# Altium PCB PCB1.PcbDoc
Units mil, origin at the board's own origin, x right, y up, seen from the top; angles counter-clockwise.
Board outline 6000 x 4000 mil, 2 copper layers (Top Layer, Bottom Layer); 24 components, 23 nets, 82 pads, 0 vias.
Unrouted connection lines stored in the file: 52.
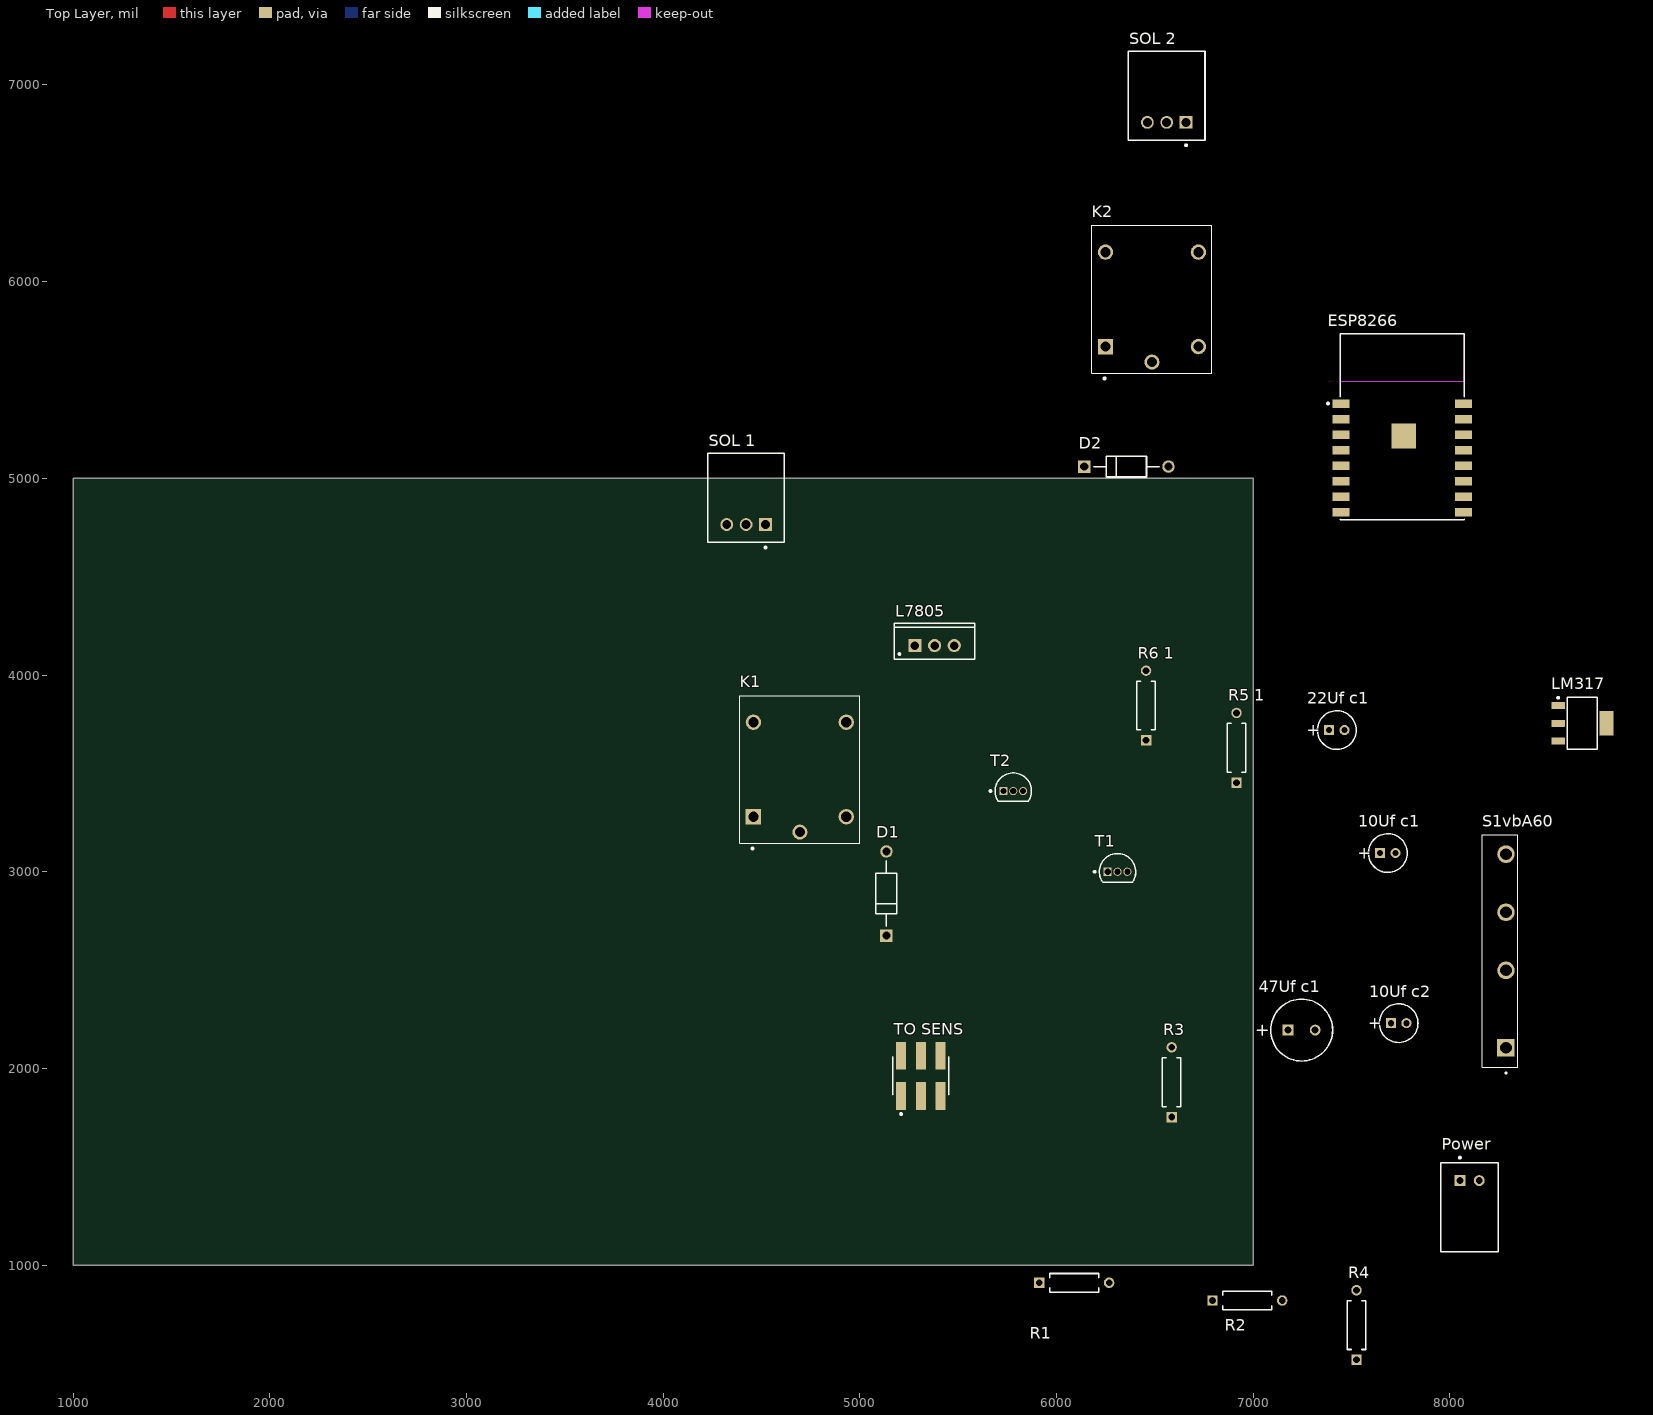
[diagram p0: Top Layer view]
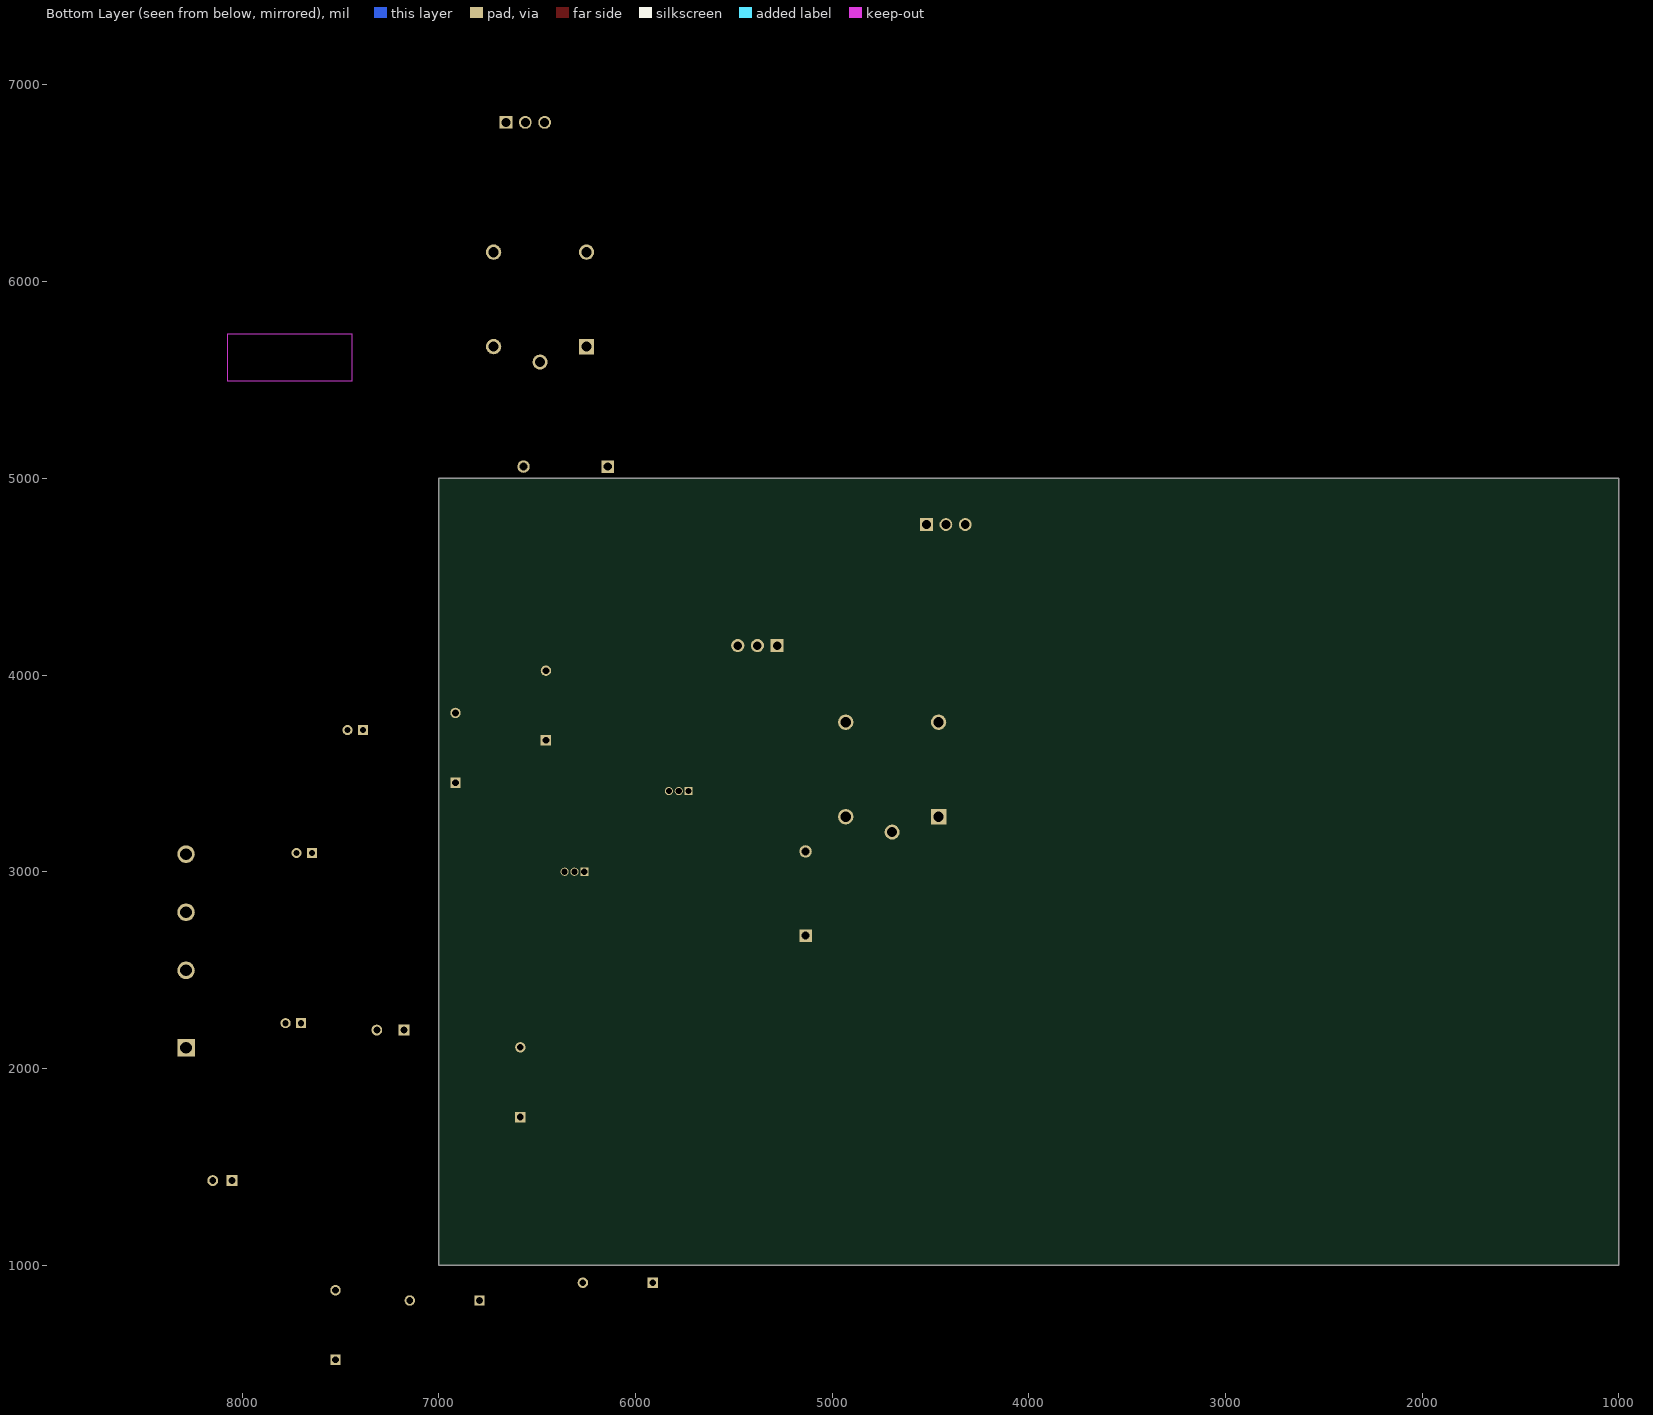
[diagram p1: Bottom Layer view, seen from below]

## Layer stack, top to bottom
Top Solder: solder mask 0.4, Solder Resist, Dk 3.5
Top Layer: signal copper 1.4
Dielectric 1: dielectric 12.6, FR-4, Dk 4.8
Bottom Layer: signal copper 1.4
Bottom Solder: solder mask 0.4, Solder Resist, Dk 3.5

## Board outline
1000,1000 7000,1000 7000,5000 1000,5000

## Design rules (kind name [scope] priority, off if disabled: settings)
BoardOutlineClearance [All] p1: gap=7.87 ignorepadtopadclearanceinfootprint=FALSE
Clearance [All] p1: gap=5 ignorepadtopadclearanceinfootprint=FALSE except(9.84: Arc-Hole Track-Hole SMDPad-Hole THPad-Hole Via-Hole Fill-Hole Poly-Hole Region-Hole Text-Hole)
ComponentClearance [All] p1: gap=5 collisioncheckmode=3 verticalgap=5 showdistances=TRUE
DiffPairsRouting [All] p1: maxlimit=10 minlimit=5 mostfreqgap=5 toplayer_minwidth=5 toplayer_maxwidth=1000 toplayer_prefwidth=5 bottomlayer_minwidth=5 bottomlayer_maxwidth=1000 bottomlayer_prefwidth=5 maxuncoupledlength=500
Height [All] p1: minheight=0 maxheight=71497.94 prefheight=500
HoleSize [All] p1: absolutevalues=TRUE maxlimit=248.03 minlimit=11.81 maxpercent=80.000 minpercent=20.000
HoleToHoleClearance [All] p1: gap=9.84 allowstackedmicrovias=FALSE
MinimumAnnularRing [All] p1: minimumring=3
MinimumSolderMaskSliver [All] p1: minsoldermaskwidth=0
PlaneClearance [All] p1: clearance=5
PlaneConnect PlaneConnectPowerPads [InPadClass('PowerPads')] p1: planeconnectstyle=Direct reliefexpansion=20 reliefentries=4 reliefconductorwidth=10 reliefairgap=10
PlaneConnect [All] p2: pad.planeconnectstyle=Relief pad.reliefexpansion=11.81 pad.reliefentries=4 pad.reliefconductorwidth=5 pad.reliefairgap=5 via.planeconnectstyle=Direct via.reliefexpansion=11.81 via.reliefentries=4 via.reliefconductorwidth=5 via.reliefairgap=5
PolygonConnect PolygonConnectPowerPads [All vs (InPadClass('PowerPads'))] p1: connectstyle=Direct reliefconductorwidth=10 reliefentries=4 polygonreliefangle="90 Angle" airgapwidth=10
PolygonConnect [All] p2: thpad.connectstyle=Relief thpad.reliefconductorwidth=5 thpad.reliefentries=4 thpad.polygonreliefangle="90 Angle" thpad.airgapwidth=5 smdpad.connectstyle=Relief smdpad.reliefconductorwidth=5 smdpad.reliefentries=4 smdpad.polygonreliefangle="90 Angle" smdpad.airgapwidth=5 via.connectstyle=Direct via.reliefconductorwidth=5 via.reliefentries=4 via.polygonreliefangle="90 Angle" via.airgapwidth=5
RoutingVias [All] p1: holewidth=11.81 width=23.62 viastyle="Through Hole" minholewidth=11.81 minwidth=23.62 maxholewidth=23.62 maxwidth=259.84
SilkToSilkClearance [All] p1: silktosilkclearance=0
SilkToSolderMaskClearance [IsPad] p1: minsilkscreentomaskgap=5 clearancetoexposedcopper=TRUE
SolderMaskExpansion [All] p1: expansion=2.95 istentingtop=FALSE
Width [All] p1: maxlimit=1000 minlimit=5 preferedwidth=5 minimp=50.000000 maximp=50.000000 favimp=50.000000
20 further rules are at their usual default settings.

## Components (designator, comment, footprint, x,y, rotation, side; value= is the part's Value field where it differs from the comment)
"10Uf c1" "ECA1HM100" CAPPR55-200-1100X500X1200 7684.37,3095 r0 top value=10µF
"10Uf c2" "ECA1HM100" CAPPR55-200-1100X500X1200 7739.37,2230 r0 top value=10µF
"22Uf c1" "ECA1HM220" CAPPR55-200-1100X500X1200 7425,3720 r0 top value=22µF
"47Uf c1" "ECA-2AM470" CAPPR65-350-1150X800X1250 7246.1,2195 r0 top value=47µF
D1 "1N4007-E3/54" FP-1N4007-MFG 5135,2889.09 r90 top value=15pF
D2 "1N4007-E3/54" FP-1N4007-MFG 6355,5060 r0 top value=15pF
ESP8266 "ESP-12S" FP-ESP-12S-MFG 7757.13,5262.24 r0 top
K1 "SRD-05VDC-SL-C" RELAY_SRD-05VDC-SL-C 4695,3520 r90 top
K2 "SRD-05VDC-SL-C" RELAY_SRD-05VDC-SL-C 6485,5910 r90 top
L7805 "L7805CV" TO220 5380,4150 r0 top
LM317 "LM317EMP" DCY0004A_N 8673.03,3754.45 r0 top
Power "S2B-XH-A(LF)(SN)" JST-S2B-XH-A(LF)(SN)_V 8100,1430 r0 top
R1 "MFR-25FBF52-10K" RESA60-630X240 6090,910 r0 top value=10k
R2 "MFR-25FBF52-10K" RESA60-630X240 6970,820 r0 top value=10k
R3 "MFR-25FBF52-10K" RESA60-630X240 6585,1930 r90 top value=10k
R4 "MFR-25FBF52-10K" RESA60-630X240 7525,695 r90 top value=10k
"R5 1" "MFR-25FBF52-1K" RESA60-630X240 6915,3630 r90 top value=1k
"R6 1" "MFR-25FBF52-1K" RESA60-630X240 6455,3845 r90 top value=1k
S1vbA60 "S1VBA60-7000" DIOB_LL15XB60-7000 8285,2597.13 r90 top
"SOL 1" "S3B-XH-A(LF)(SN)" JST-S3B-XH-A(LF)(SN)_V 4421.57,4765 r180 top
"SOL 2" "S3B-XH-A(LF)(SN)" JST-S3B-XH-A(LF)(SN)_V 6560,6810 r180 top
T1 "BC547CG" ONSC-TO-92-3-29-11 6310,3000 r0 top
T2 "BC547CG" ONSC-TO-92-3-29-11 5780,3410 r0 top
"TO SENS" "5-146130-2" TECO-5-146130-2_V 5310,1962.44 r0 top

## Footprints (in the part's own frame and the unit in brackets; to place one, negate y for a bottom-side part, rotate by r counter-clockwise, add the part's x,y. Pads: shape width x height; smd on the part's side, far side on the other; paste and mask are expansions set on the pad)
CAPPR55-200-1100X500X1200 [mm] "THD, 2-Leads, Dia 5mm, Pin Spacing 2mm"
  rect 1.3x1.3 hole 0.8: 1(-1,0)
  round 1.3 hole 0.8: 2(1,0)
  silkscreen extent -2.5,-2.5 2.5,2.5, body extent -2.5,-2.5 2.45,2.5, height 12
CAPPR65-350-1150X800X1250 [mm] "THD, 2-Leads, Dia 8mm, Pin Spacing 3.5mm"
  rect 1.4x1.4 hole 0.9: 1(-1.75,0)
  round 1.4 hole 0.9: 2(1.75,0)
  silkscreen extent -5.71,-4 4,4, body extent -4,-4 3.95,4, height 12.5
DCY0004A_N [mm] "SOT223, 4-Leads, Body 6.7x3.7mm, Pitch 2.3mm, IPC Medium Density"
  rrect11% 1.75x0.9 smd: 1(-3.125,2.3) 2(-3.125,0) 3(-3.125,-2.3)
  rrect6% 1.75x3.2 smd: 4(3.125,0)
  silkscreen extent -3.25,-3.35 1.95,3.42, body extent -3.5,-3.25 3.5,3.25, height 1.62
DIOB_LL15XB60-7000 [mm]
  rect 2.265x2.265 / inner round 2.265 / far side rect 2.265x2.265 hole 1.51: 1(-12.5,0)
  round 2.265 hole 1.51: 2(-2.5,0) 3(5,0) 4(12.5,0)
  silkscreen extent -15.85,-1.55 15,3.05, body extent -15,-1.55 15,3.05, height 24.5
FP-1N4007-MFG [mm]
  rect 1.6x1.6 hole 1.05 paste-1000 mask+0: 1(-5.438,0)
  round 1.6 hole 1.05 paste-1000 mask+0: 2(5.438,0)
  silkscreen extent -4.24,-1.35 4.24,1.35, body extent -6.34,-1.45 6.34,1.45, height 0.25
FP-ESP-12S-MFG [mm]
  rect 2.2x1.1 smd paste+0 mask+0: 1(-7.9,2.95) 2(-7.9,0.95) 3(-7.9,-1.05) 4(-7.9,-3.05) 5(-7.9,-5.05) 6(-7.9,-7.05) 7(-7.9,-9.05) 8(-7.9,-11.05) 9(7.9,-11.05) 10(7.9,-9.05) 11(7.9,-7.05) 12(7.9,-5.05) 13(7.9,-3.05) 14(7.9,-1.05) 15(7.9,0.95) 16(7.9,2.95)
  rect 3.2x3.2 smd paste+0 mask+0: 17(0.2,-1.2)
  Keep-Out Layer region: -8,5.9 8,5.9 8,12 -8,12
  Keep-Out Layer region: -8,5.9 8,5.9 8,12 -8,12
  silkscreen extent -9.7,-12 8,12, body extent -9.1,-12.1 9.1,12.1, height 0.25
JST-S2B-XH-A(LF)(SN)_V [mm] "Header, 2-Leads, Body 7.4x11.5mm, Pitch 2.5mm"
  rect 1.4x1.4 hole 0.9: 1(-1.25,0)
  round 1.4 hole 0.9: 2(1.25,0)
  silkscreen extent -3.7,-9.2 3.7,3.08, body extent -3.7,-9.2 3.7,2.3, height 5.95
JST-S3B-XH-A(LF)(SN)_V [mm] "Header, 3-Leads, Body 9.9x11.5mm, Pitch 2.5mm"
  rect 1.65x1.65 hole 1.15: 1(-2.5,0)
  round 1.65 hole 1.15: 2(0,0) 3(2.5,0)
  silkscreen extent -4.95,-9.2 4.95,3.08, body extent -4.95,-9.2 4.95,2.3, height 6.15
ONSC-TO-92-3-29-11 [mm] "TO, 3-Leads, Body Dia 4.7mm, Pitch 1.27mm"
  rect 1.05x1.05 hole 0.8: 1(-1.27,0)
  round 1.05 hole 0.8: 2(0,0) 3(1.27,0)
  silkscreen extent -3.07,-1.34 2.35,2.35, body extent -2.35,-1.33 2.36,2.36, height 7.87
RELAY_SRD-05VDC-SL-C [mm]
  rect 1.98x1.98 / inner round 1.98 / far side rect 1.98x1.98 hole 1.32: A1(-6.1,6)
  round 1.98 hole 1.32: A2(-6.1,-6) NC(6.1,6) NO(6.1,-6)
  round 1.935 hole 1.29: COM(-8.1,0)
  silkscreen extent -10.3,-7.75 9.55,7.75, body extent -9.6,-7.8 9.6,7.8, height 15.8
RESA60-630X240 [mm] "Axial Resistor, 2-Leads, Dia 2.4mm, Body Length 6.3mm"
  rect 1.35x1.35 hole 0.85: 1(-4.5,0)
  round 1.35 hole 0.85: 2(4.5,0)
  silkscreen extent -3.15,-1.2 3.15,1.2, body extent -4.77,-1.19 4.77,1.2, height 2.4
TECO-5-146130-2_V [mm] "Header, 6-Leads, Body 7.21x4.88mm, Pitch 2.54mm"
  rect 1.27x3.56 smd: 1(-2.54,-2.605) 2(-2.54,2.605) 3(0,-2.605) 4(0,2.605) 5(2.54,-2.605) 6(2.54,2.605)
  silkscreen extent -3.6,-5.06 3.6,2.44, body extent -3.61,-3.77 3.61,3.64, height 9.74
TO220 [mm] "TO, Thru-Hole, Vertical, Heatsink Mounted; 3 In-Line Leads; Pitch 2.54 mm"
  rect 1.7x1.7 hole 1.1: 1(-2.54,0)
  round 1.7 hole 1.1: 2(0,0) 3(2.54,0)
  silkscreen extent -5.2,-1.75 5.2,2.85, body extent -5.25,-1.8 5.25,2.9, height 19.7

## Part data
"10Uf c1" "10Uf c2": library part CMP-001-00025-7, "Aluminum Electrolytic Capacitor, 10 uF, +/- 20%, 50 V, -40 to 85 degC, 2-Pin THD, RoHS, Bulk", Capacitor Type=Electrolytic, Case/Package=Radial, Manufacturer=Panasonic, Max Operating Temperature=85°C, Min Operating Temperature=-40°C, Package Description="2-Pin Radial Lead, Dia 5 mm, Height 12 mm", Package Quantity=200, Package Reference=CAPPR55-200-1100X500X1200, Ripple Current=65mA, Tolerance=20%, Voltage Rating=50V, Datasheet URL=https://industrial.panasonic.com/cdbs/www-data/pdf/RDF0000/ABA0000C1218.pdf, Datasheet Version="Rev. 05, 10/2016", Diameter=5mm, Lead Pitch=2mm, Manufacturer URL=http://www.panasonic.com/, Mounting Technology=TH, Packaging=Bulk, Pins=2, Ripple Current (AC)=65mA, RoHS Compliant=True
"22Uf c1": library part CMP-001-00027-7, "Aluminum Electrolytic Capacitor, 22 uF, +/- 20%, 50 V, -40 to 85 degC, 2-Pin THD, RoHS, Bulk", Capacitor Type=Electrolytic, Case/Package=Radial, Manufacturer=Panasonic, Max Operating Temperature=85°C, Min Operating Temperature=-40°C, Package Description="2-Pin Radial Lead, Dia 5 mm, Height 12 mm", Package Quantity=200, Package Reference=CAPPR55-200-1100X500X1200, Ripple Current=100mA, Tolerance=20%, Voltage Rating=50V, Datasheet URL=https://industrial.panasonic.com/cdbs/www-data/pdf/RDF0000/ABA0000C1218.pdf, Datasheet Version="Rev. 05, 10/2016", Diameter=5mm, Lead Pitch=2mm, Manufacturer URL=http://www.panasonic.com/, Mounting Technology=TH, Packaging=Bulk, Pins=2, Ripple Current (AC)=100mA, RoHS Compliant=True
"47Uf c1": library part CMP-001-00036-7, "Aluminum Electrolytic Capacitor, 47 uF, +/- 20%, 100 V, -40 to 85 degC, 2-Pin THD, RoHS, Bulk", Capacitor Type=Electrolytic, Case/Package=Radial, Manufacturer=Panasonic, Max Operating Temperature=85°C, Min Operating Temperature=-40°C, Package Description="2-Pin Radial Lead, Dia 8 mm, Height 12.5 mm", Package Quantity=200, Package Reference=CAPPR65-350-1150X800X1250, Ripple Current=180mA, Tolerance=20%, Voltage Rating=100V, Datasheet URL=http://industrial.panasonic.com/cdbs/www-data/pdf/RDF0000/ABA0000C1047.pdf, Datasheet Version=Mar-16, Diameter=8mm, Lead Pitch=3.5mm, Manufacturer URL=http://www.panasonic.com/, Mounting Technology=TH, Packaging=Bulk, Pins=2, Ripple Current (AC)=180mA, RoHS Compliant=True
D1 D2: library part CMP-02540-000046-1, "DIODE GEN PURP 1KV 1A DO204AL", Capacitance=15pF, Forward Current=1A, Manufacturer=Vishay, Max Junction Temp=+150°C, Max Repetitive Reverse Voltage=1000V, Max Surge Forward Current=30A, Package=1N4007, Peak Reverse Current=30uA, Temperature="-50°C to +150°C", Temperature Range Low=-50°C, Automotive=No, Category=Diode, ComponentLink2Description=Datasheet, ComponentLink2URL=http://www.vishay.com/docs/88503/1n4001.pdf, Device Class L1="Discrete Semiconductors", Device Class L2=Diodes, Device Class L3="Rectifier Diodes", Digikey Description="DIODE GEN PURP 1KV 1A DO204AL", Height=2.7mm, Ipc Land Pattern Name=DIOPA1088W105L520D270, Lead Free=Yes, Manufacturer Part Number=1N4007-E3/54, Mouser Description="Rectifiers Vr/1000V Io/1A", Octopart=https://octopart.com/1n4007-e3%2F54-vishay-39548207, RoHS=TRUE, Temperature Range High=+150°C
ESP8266: library part CMP-204316-000002-1, "RX TXRX MOD WIFI PCB TRACE SMD", Frequency=2.484GHz, Data Rate=54Mbps, Interface=I2C, Sensitivity=-90dBm, Series=-
K1 K2: library part CMP-012-000000-1, "5V Trigger Relay Module For Arduino And Raspberry Pi 5V Trigger Relay Module For Arduino And Raspberry Pi", Package="NON STANDARD-5 Songle Relay", Availability="Not in stock", Check_prices=https://www.snapeda.com/parts/SRD-05VDC-SL-C/Songle+Relay/view-part/?ref=eda, Component Type=Standard, Design Item ID=SRD-05VDC-SL-C, MF="Songle Relay", MP=SRD-05VDC-SL-C, Pin Count=5, Price=None, SnapEDA_Link=https://www.snapeda.com/parts/SRD-05VDC-SL-C/Songle+Relay/view-part/?ref=snap, Source=SRD-05VDC-SL-C.SchLib
L7805: library part CMP-0244-00483-1, "Positive Voltage Regulator, 5V, 3-Pin TO-220", ComponentLink1Description="Manufacturer URL", ComponentLink1URL=http://www.st.com, ComponentLink2Description=Datasheet, ComponentLink2URL=http://www.st.com/internet/com/TECHNICAL_RESOURCES/TECHNICAL_LITERATURE/DATASHEET/CD00000444.pdf, ComponentLink3Description="Package Specification", ComponentLink3URL=http://www.st.com/internet/com/TECHNICAL_RESOURCES/TECHNICAL_LITERATURE/PACKAGE_INFORMATION/CD00004649.pdf, DatasheetVersion=16/11/2011, PackageDescription="TO, Thru-Hole, Vertical, Heatsink Mounted; 3 In-Line Leads; Pitch 2.54 mm", PackageReference=TO220, PackageVersion=ver3.0
LM317: library part CMP-0062-01706-3, "3-Terminal Adjustable Regulator, 4-pin SOT-223", Manufacturer="Texas Instruments", PackageTopMarking=XYTT*N01A, PowerWise=N, Code_IPC=SOT223-4, Code_JEDEC=TO-261-AA, ComponentLink1Description="Datasheet URL", ComponentLink1URL=http://www.ti.com/general/docs/lit/getliterature.tsp?genericPartNumber=LM317-N&fileType=pdf, CompType="LDO IC", PackageDescription="Molded SOT-223, 6.50 x 3.56 x 1.6mm Body, 4 Lead, 2.3mm Pitch", PackageReference=DCY0004A, PinCount=4, RoHS=N
Power: library part CMP-002-00032-2, "Male Header, Pitch 2.5 mm, 1 x 2 Position, Height 6.1 mm, Tail Length 3.4 mm, -25 to 85 degC, RoHS, Bulk", Manufacturer=JST, Max Operating Temperature=85°C, Min Operating Temperature=-25°C, Package Description="XH Series Disconnectable Crimp Style Connector, Pitch 2.5 mm, 1 x 2 Position, Height 6.1 mm, Tail Length 3.4 mm", Case/Package=S2B-XH-A(LF)(SN), Connector Type=Header, Datasheet URL=http://www.jst-mfg.com/product/pdf/eng/eXH.pdf, Datasheet Version=May-16, Gender=Male, Manufacturer URL=http://www.jst.com/home2.html, Mounting Technology=TH, Package Reference=S2B-XH-A(LF)(SN), RoHS Compliant=Unknown
R1 R2 R3 R4: library part CMP-009-00047-4, "Axial Resistor, 10 KOhm, +/- 1%, 0.25 W, -55 to 155 degC, 2-Pin THD, RoHS, Bulk", Case/Package=Axial, Manufacturer=Yageo, Max Operating Temperature=155°C, Min Operating Temperature=-55°C, Package Description="2-Pin Axial Lead, Dia 2.4 mm, Body Length 6.3 mm", Package Quantity=200, Package Reference=MFR-25, Power=250mW, Tolerance=1%, Voltage Rating=250V, Datasheet URL=http://www.yageo.com/documents/recent/Yageo%20LR_MFR_2013.pdf, Datasheet Version=Apr-13, Manufacturer URL=http://www.yageo.com/, Mounting Technology=TH, Packaging=Bulk, RoHS Compliant=True
"R5 1" "R6 1": library part CMP-009-00048-4, "Axial Resistor, 1 KOhm, +/- 1%, 250 mW, -55 to 155 degC, 2-Pin THD, RoHS, Bulk", Case/Package=Axial, Manufacturer=Yageo, Max Operating Temperature=155°C, Min Operating Temperature=-55°C, Package Description="2-Pin Axial Lead, Dia 2.4 mm, Body Length 6.3 mm", Package Quantity=200, Package Reference=MFR-25, Power=250mW, Tolerance=1%, Voltage Rating=250V, Composition=CarbonFilm, Datasheet URL=http://www.yageo.com/documents/recent/Yageo%20LR_MFR_2013.pdf, Datasheet Version=Apr-13, Manufacturer URL=http://www.yageo.com/, Mounting Technology=TH, Packaging=Bulk, RoHS Compliant=True
S1vbA60: "1 IO, 600 VRM, 700 VRSM, THD Bridge Diode, 1V Package Type", Package="SIP-4 Shindengen", Availability="In Stock", Check_prices=https://www.snapeda.com/parts/S1VBA60-7000/Shindengen/view-part/?ref=eda, MF=Shindengen, MP=S1VBA60-7000, Price=None, SnapEDA_Link=https://www.snapeda.com/parts/S1VBA60-7000/Shindengen/view-part/?ref=snap
"SOL 1" "SOL 2": library part CMP-002-00033-2, "Male Header, Pitch 2.5 mm, 1 x 3 Position, Height 6.1 mm, Tail Length 3.4 mm, -25 to 85 degC, RoHS, Bulk", Manufacturer=JST, Max Operating Temperature=85°C, Min Operating Temperature=-25°C, Package Description="Male Header, Pitch 2.5 mm, 1 x 3 Position, Height 6.1 mm, Tail Length 3.4 mm", Case/Package=S3B-XH-A(LF)(SN), Connector Type=Header, Datasheet URL=http://www.jst-mfg.com/product/pdf/eng/eXH.pdf, Datasheet Version=May-16, Gender=Male, Manufacturer URL=http://www.jst.com/home2.html, Mounting Technology=TH, Package Reference=S3B-XH-A(LF)(SN), RoHS Compliant=Unknown
T1 T2: library part CMP-1048-01464-1, "Amplifier Transistor, NPN Silicon, 3-Pin TO-92, Pb-Free, Bulk Box", Manufacturer="On Semiconductor", ComponentLink1Description="Manufacturer URL", ComponentLink1URL=http://www.onsemi.com/, ComponentLink2Description=Datasheet, ComponentLink2URL=http://www.onsemi.com/pub_link/Collateral/BC546-D.PDF, ComponentLink3Description="Package Specification", ComponentLink3URL=http://www.onsemi.cn/pub_link/Collateral/2N6426-D.PDF, DatasheetVersion="Rev. 7", fT Min (MHz)=150, IC Continuous (A)=0.1, Mounting Technology="Through Hole", PackageDescription="3-Pin Transistor Outline, Body 4.825 x 3.685 mm, Pitch 1.27 mm", PackageReference=TO-92-3-29-11_AM_SL, PackageVersion="Rev. AM", Packing="Bulk Box", PartNumber=BC547CG, Polarity=NPN, RoHS=TRUE
"TO SENS": library part CMP-002-00018-2, "Male Header, Pitch 2.54 mm, 2 x 3 Position, Height 8.13 mm, -65 to 125 degC, RoHS, Tube", Manufacturer="TE Connectivity", Max Operating Temperature=125°C, Min Operating Temperature=-65°C, Package Description="Male Header, Pitch 2.54 mm, 2 x 3 Position, Height 8.13 mm", Case/Package=5-146130-2, Connector Type=Header, Datasheet URL=http://www.te.com/commerce/DocumentDelivery/DDEController?Action=showdoc&DocId=Customer+Drawing%7F146130%7FM%7Fpdf%7FEnglish%7FENG_CD_146130_M.pdf%7F5-146130-2, Datasheet Version=Oct-15, Gender=Male, Manufacturer URL=http://www.te.com/, Mounting Technology=SM, Package Reference=5-146130-2, RoHS Compliant=Unknown

## Nets (pads, with @x,y where several pads share a name; then routed paths per layer and width w, separated by ;. In a path a pad name is that pad's centre, name@x,y a point inside that pad or via, vN(x,y) a via of type N, cw(c..) or ccw(c..) an arc to the next point about the centre after c; other vN are vias at no path point)
GND: "10Uf c1.2" "10Uf c2.2" "22Uf c1.2" "47Uf c1.2" "TO SENS.5" "TO SENS.6" ESP8266.9 L7805.2 LM317.1 Power.1 R3.1 S1vbA60.3 S1vbA60.4 T1.3 T2.3
"Net10Uf c1_1": "10Uf c1.1" "47Uf c1.1" L7805.1 S1vbA60.1
"Net10Uf c2_1": "10Uf c2.1" D1.1 D2.1 K1.A1 K2.A1 L7805.3 LM317.3 LM317.4
"Net22Uf c1_1": "22Uf c1.1" "TO SENS.1" "TO SENS.2" ESP8266.8 LM317.2 R1.2 R2.2 R4.1
NetD1_2: D1.2 K1.A2 T1.1
NetD2_2: D2.2 K2.A2 T2.1
NetESP8266_1: ESP8266.1 R1.1
NetESP8266_3: ESP8266.3 R2.1
NetESP8266_4: "R5 1.2" ESP8266.4
NetESP8266_5: "R6 1.2" ESP8266.5
NetESP8266_6: "TO SENS.3" ESP8266.6
NetESP8266_7: "TO SENS.4" ESP8266.7
NetESP8266_10: ESP8266.10 R3.2
NetESP8266_12: ESP8266.12 R4.2
NetK1_COM: "SOL 1.2" K1.COM
NetK1_NC: "SOL 1.3" K1.NC
NetK1_NO: "SOL 1.1" K1.NO
NetK2_COM: "SOL 2.2" K2.COM
NetK2_NC: "SOL 2.3" K2.NC
NetK2_NO: "SOL 2.1" K2.NO
NetPower_2: Power.2 S1vbA60.2
"NetR5 1_1": "R5 1.1" T1.2
"NetR6 1_1": "R6 1.1" T2.2
pads on no net: ESP8266.2 ESP8266.11 ESP8266.13 ESP8266.14 ESP8266.15 ESP8266.16 ESP8266.17

## Text inside footprints (layer, text, board x,y; h text height)
"10Uf c1": Top Overlay "+" at 7530.51,3065.98 h59.06
"10Uf c2": Top Overlay "+" at 7585.51,2200.98 h59.06
"22Uf c1": Top Overlay "+" at 7271.14,3690.98 h59.06